# Altium PCB version2.0.PcbDoc
Units mil, origin at the board's own origin, x right, y up, seen from the top; angles counter-clockwise.
Board outline 6000 x 4000 mil, 2 copper layers (Top Layer, Bottom Layer); 2 components, 7 nets, 34 pads, 2 vias.
Unrouted connection lines stored in the file: 4.
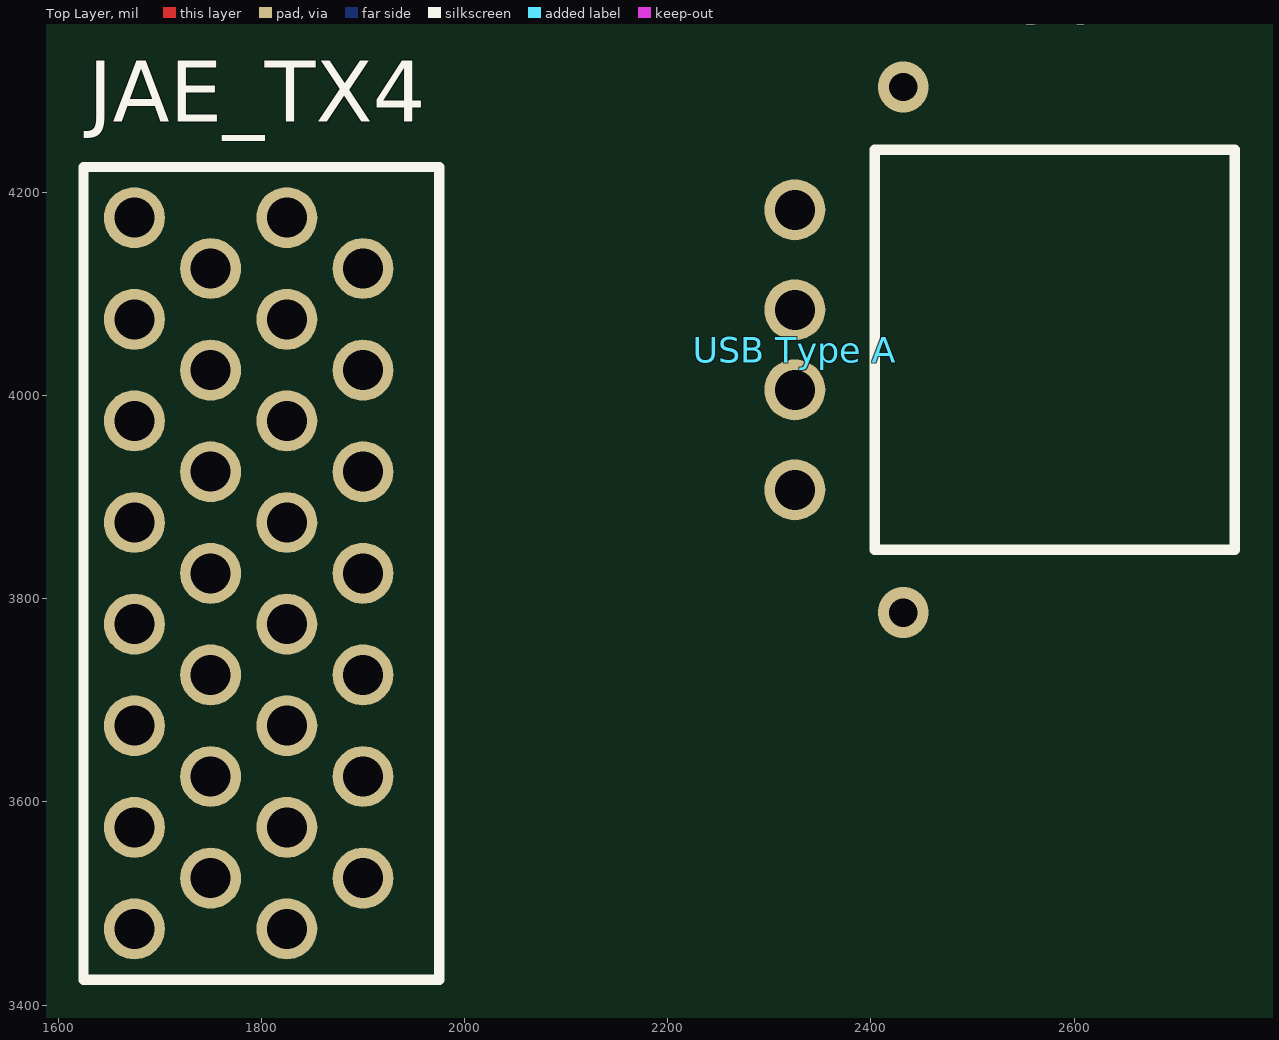
[diagram p0: Top Layer view]
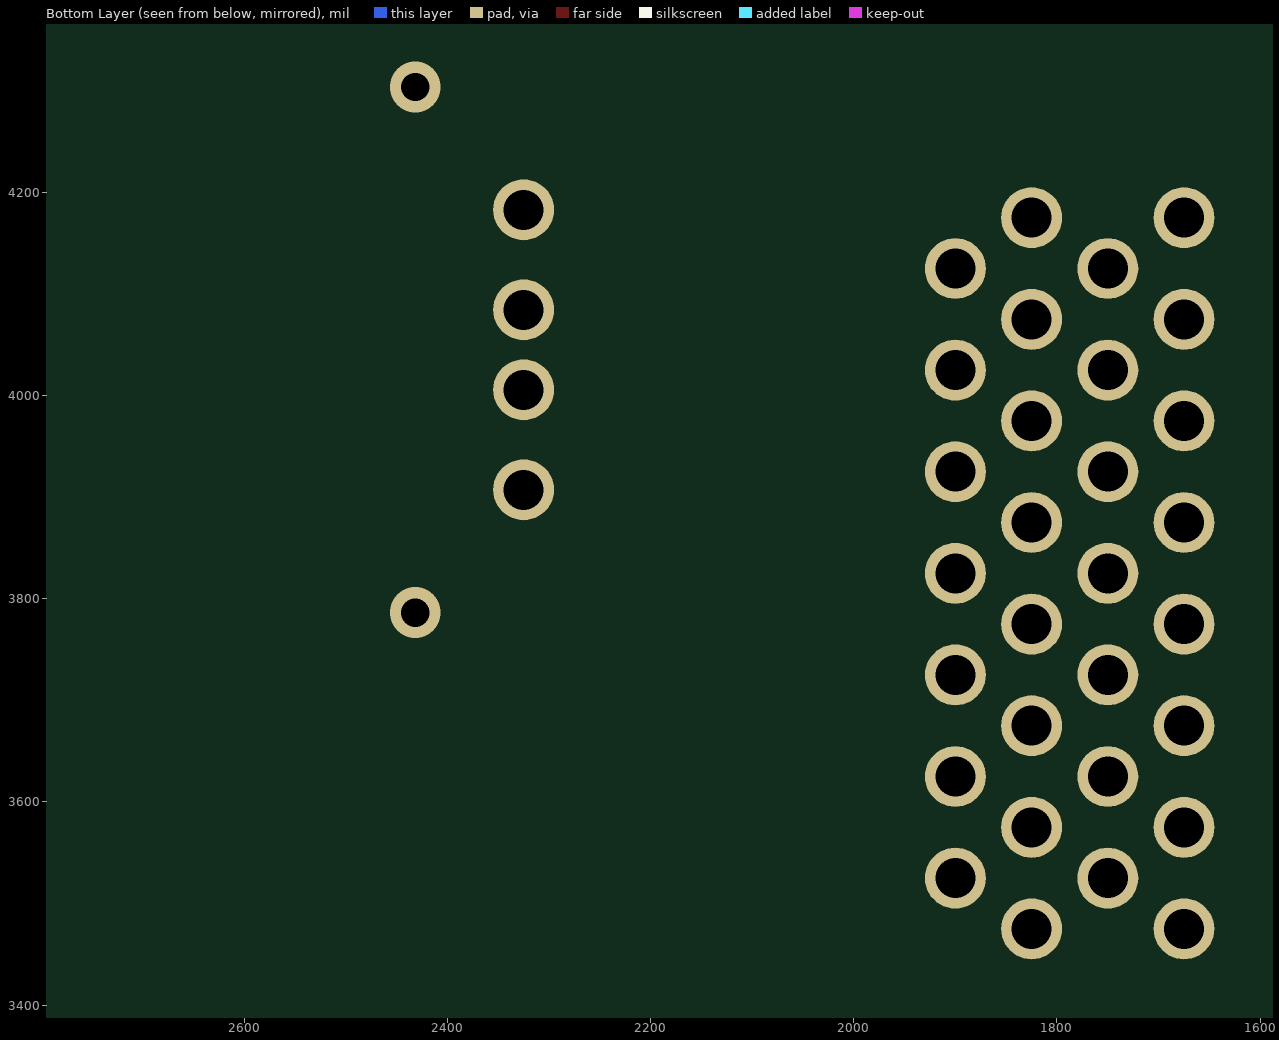
[diagram p1: Bottom Layer view, seen from below]

## Layer stack, top to bottom
Top Solder: solder mask 0.4, Solder Resist, Dk 3.5
Top Layer: signal copper 1.4
Dielectric 1: dielectric 12.6, FR-4, Dk 4.8
Bottom Layer: signal copper 1.4
Bottom Solder: solder mask 0.4, Solder Resist, Dk 3.5

## Board outline
1000,1000 7000,1000 7000,5000 1000,5000

## Design rules (kind name [scope] priority, off if disabled: settings)
Clearance [All] p1: gap=10
PolygonConnect [All] p1: connectstyle=Relief reliefconductorwidth=10 reliefentries=4 polygonreliefangle="90 Angle" airgapwidth=10
RoomDefinition Accessory_Breakout_X1 [InComponentClass('Accessory_Breakout_X1')] p1: confinementstyle=ConfineIn formatcopy=TRUE lockcomponents=FALSE outline 2568.31,2918.66 3653.31,2918.66 3653.31,3848.66 2568.31,3848.66
RoutingVias [All] p1: holewidth=28 width=50 viastyle="Through Hole" minholewidth=28 minwidth=50 maxholewidth=28 maxwidth=50
SolderMaskExpansion [All] p1: expansion=4
Width [All] p1: maxlimit=10 minlimit=10 preferedwidth=10
30 further rules are at their usual default settings.

## Components (designator, comment, footprint, x,y, rotation, side; value= is the part's Value field where it differs from the comment)
JAE_TX4 "30 pin" TX_24 1675,3475 r0 top
"USB Type A" "USB" "USB 2.0 Type A Female" 2325,4045 r90 top

## Footprints (in the part's own frame and the unit in brackets; to place one, negate y for a bottom-side part, rotate by r counter-clockwise, add the part's x,y. Pads: shape width x height; smd on the part's side, far side on the other; paste and mask are expansions set on the pad)
TX_24 [mil]
  round 60 hole 39.37: 1(0,0) 2(75,50) 3(0,100) 4(75,150) 5(0,200) 6(75,250) 7(0,300) 8(75,350) 9(0,400) 10(75,450) 11(0,500) 12(75,550) 13(0,600) 14(75,650) 15(0,700) 16(150,0) 17(225,50) 18(150,100) 19(225,150) 20(150,200) 21(225,250) 22(150,300) 23(225,350) 24(150,400) 25(225,450) 26(150,500) 27(225,550) 28(150,600) 29(225,650) 30(150,700)
  silkscreen extent -50,-50 300,750
"USB 2.0 Type A Female" [mil]
  round 60 hole 39.37: 1(-137.8,0) 2(-39.37,0) 3(39.37,0) 4(137.8,0)
  silkscreen extent -197,-433 197,-79

## Part data
JAE_TX4: library part JAE_TX4
"USB Type A": library part Component_1

## Via types
v1: diameter 50, hole 28, Top Layer to Bottom Layer, 2 vias

## Nets (pads, with @x,y where several pads share a name; then routed paths per layer and width w, separated by ;. In a path a pad name is that pad's centre, name@x,y a point inside that pad or via, vN(x,y) a via of type N, cw(c..) or ccw(c..) an arc to the next point about the centre after c; other vN are vias at no path point)
+5V_USB: "USB Type A.1"
BATT: JAE_TX4.15
D_N: "USB Type A.2"
D_P: "USB Type A.3"
GND: "USB Type A.4" JAE_TX4.21 JAE_TX4.27 JAE_TX4.28 JAE_TX4.29
USB_5V: JAE_TX4.19
USB_GND: JAE_TX4.16
pads on no net: JAE_TX4.1 JAE_TX4.2 JAE_TX4.3 JAE_TX4.4 JAE_TX4.5 JAE_TX4.6 JAE_TX4.7 JAE_TX4.8 JAE_TX4.9 JAE_TX4.10 JAE_TX4.11 JAE_TX4.12 JAE_TX4.13 JAE_TX4.14 JAE_TX4.17 JAE_TX4.18 JAE_TX4.20 JAE_TX4.22 JAE_TX4.23 JAE_TX4.24 JAE_TX4.25 JAE_TX4.26 JAE_TX4.30
copper on no net:
  other v1: 2431.69,3786.34 2431.69,4303.66